# Altium PCB OutputBoard.PcbDoc
Units mil, origin at the board's own origin, x right, y up, seen from the top; angles counter-clockwise.
Board outline 3150 x 2825 mil, 2 copper layers (Top Layer, Bottom Layer); 12 components, 7 nets, 42 pads, 0 vias.
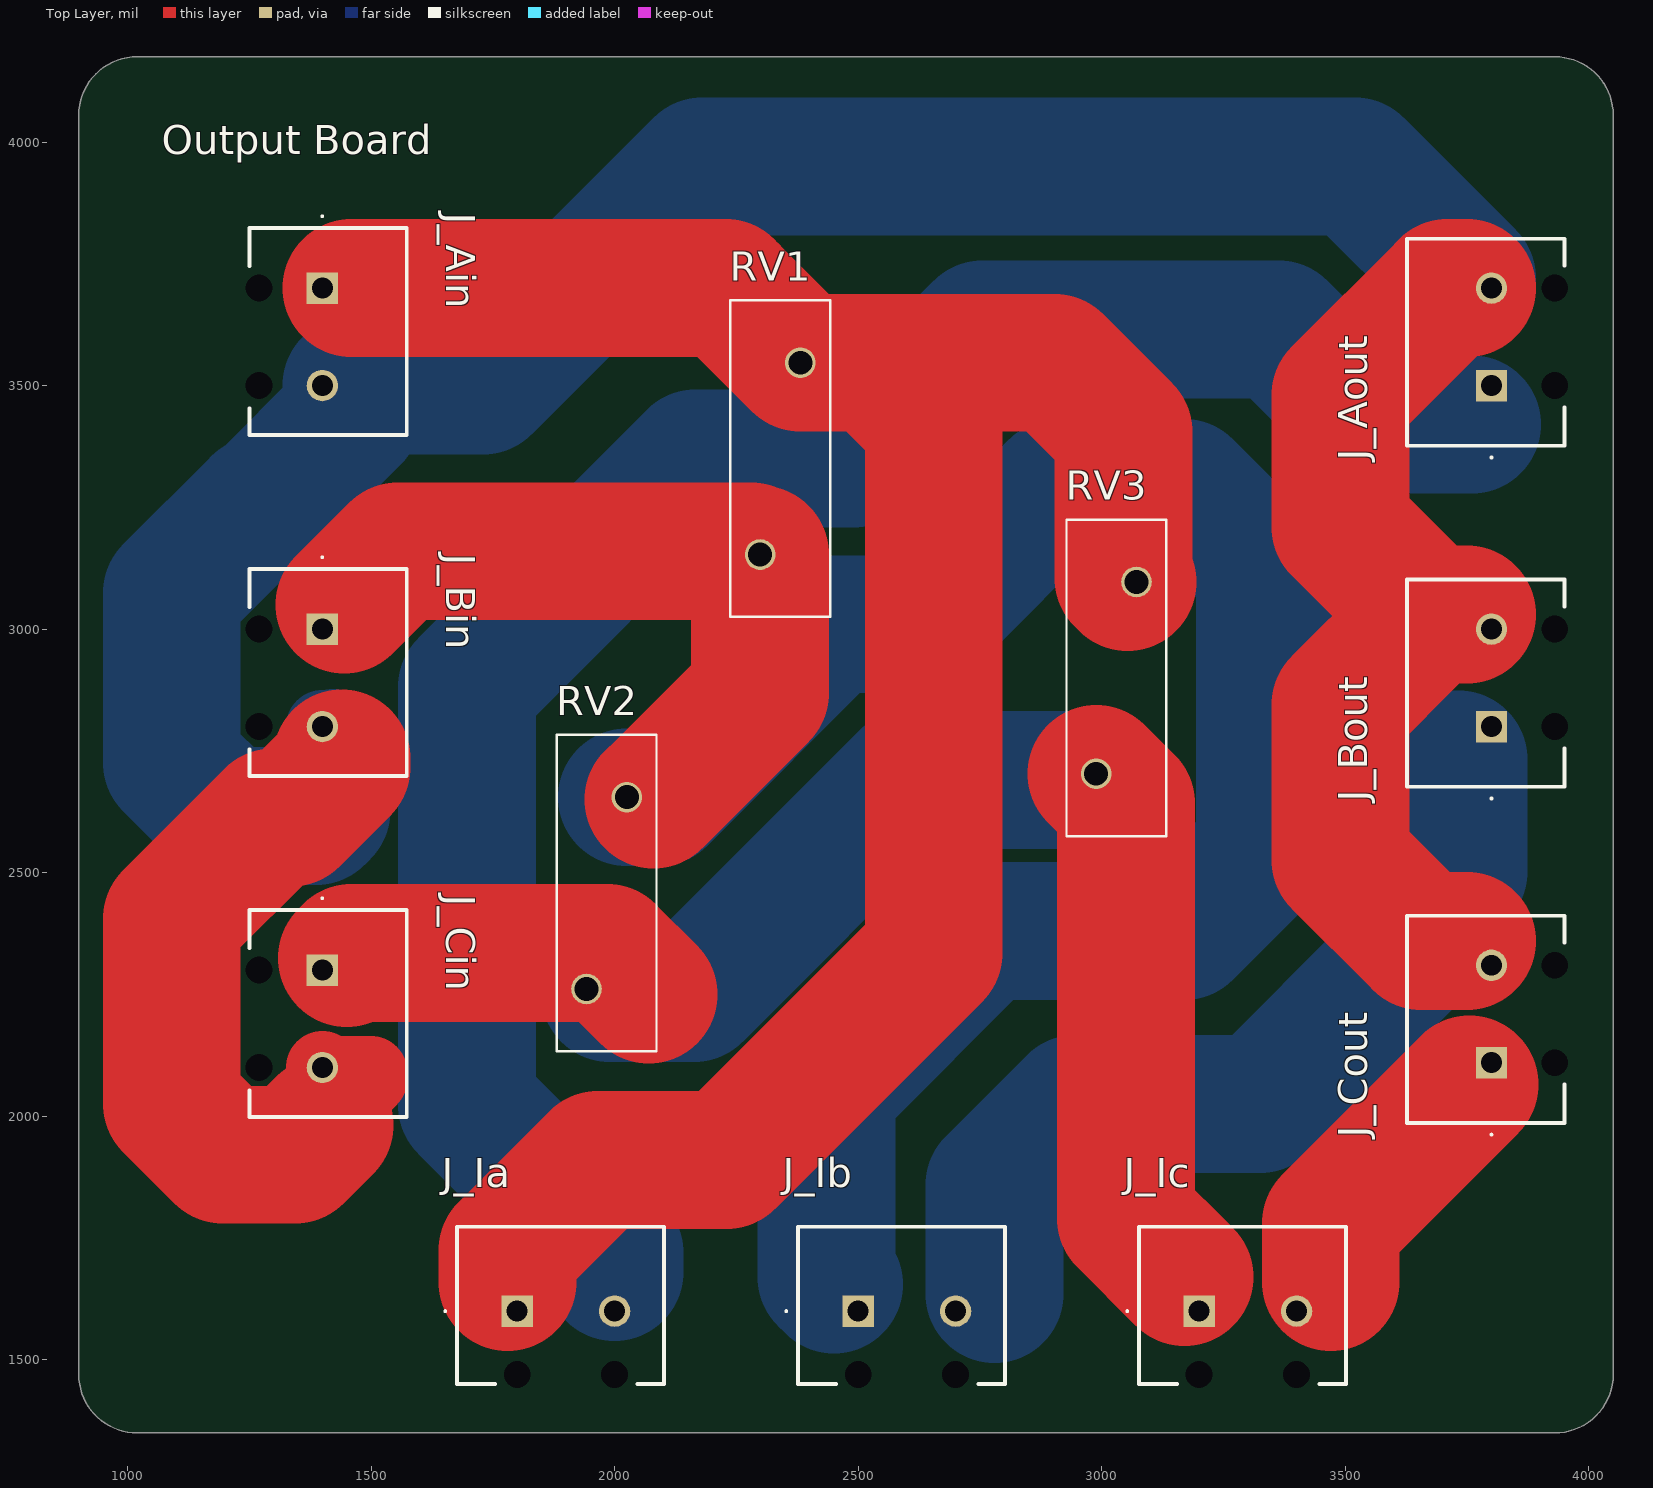
[diagram p0: Top Layer view]
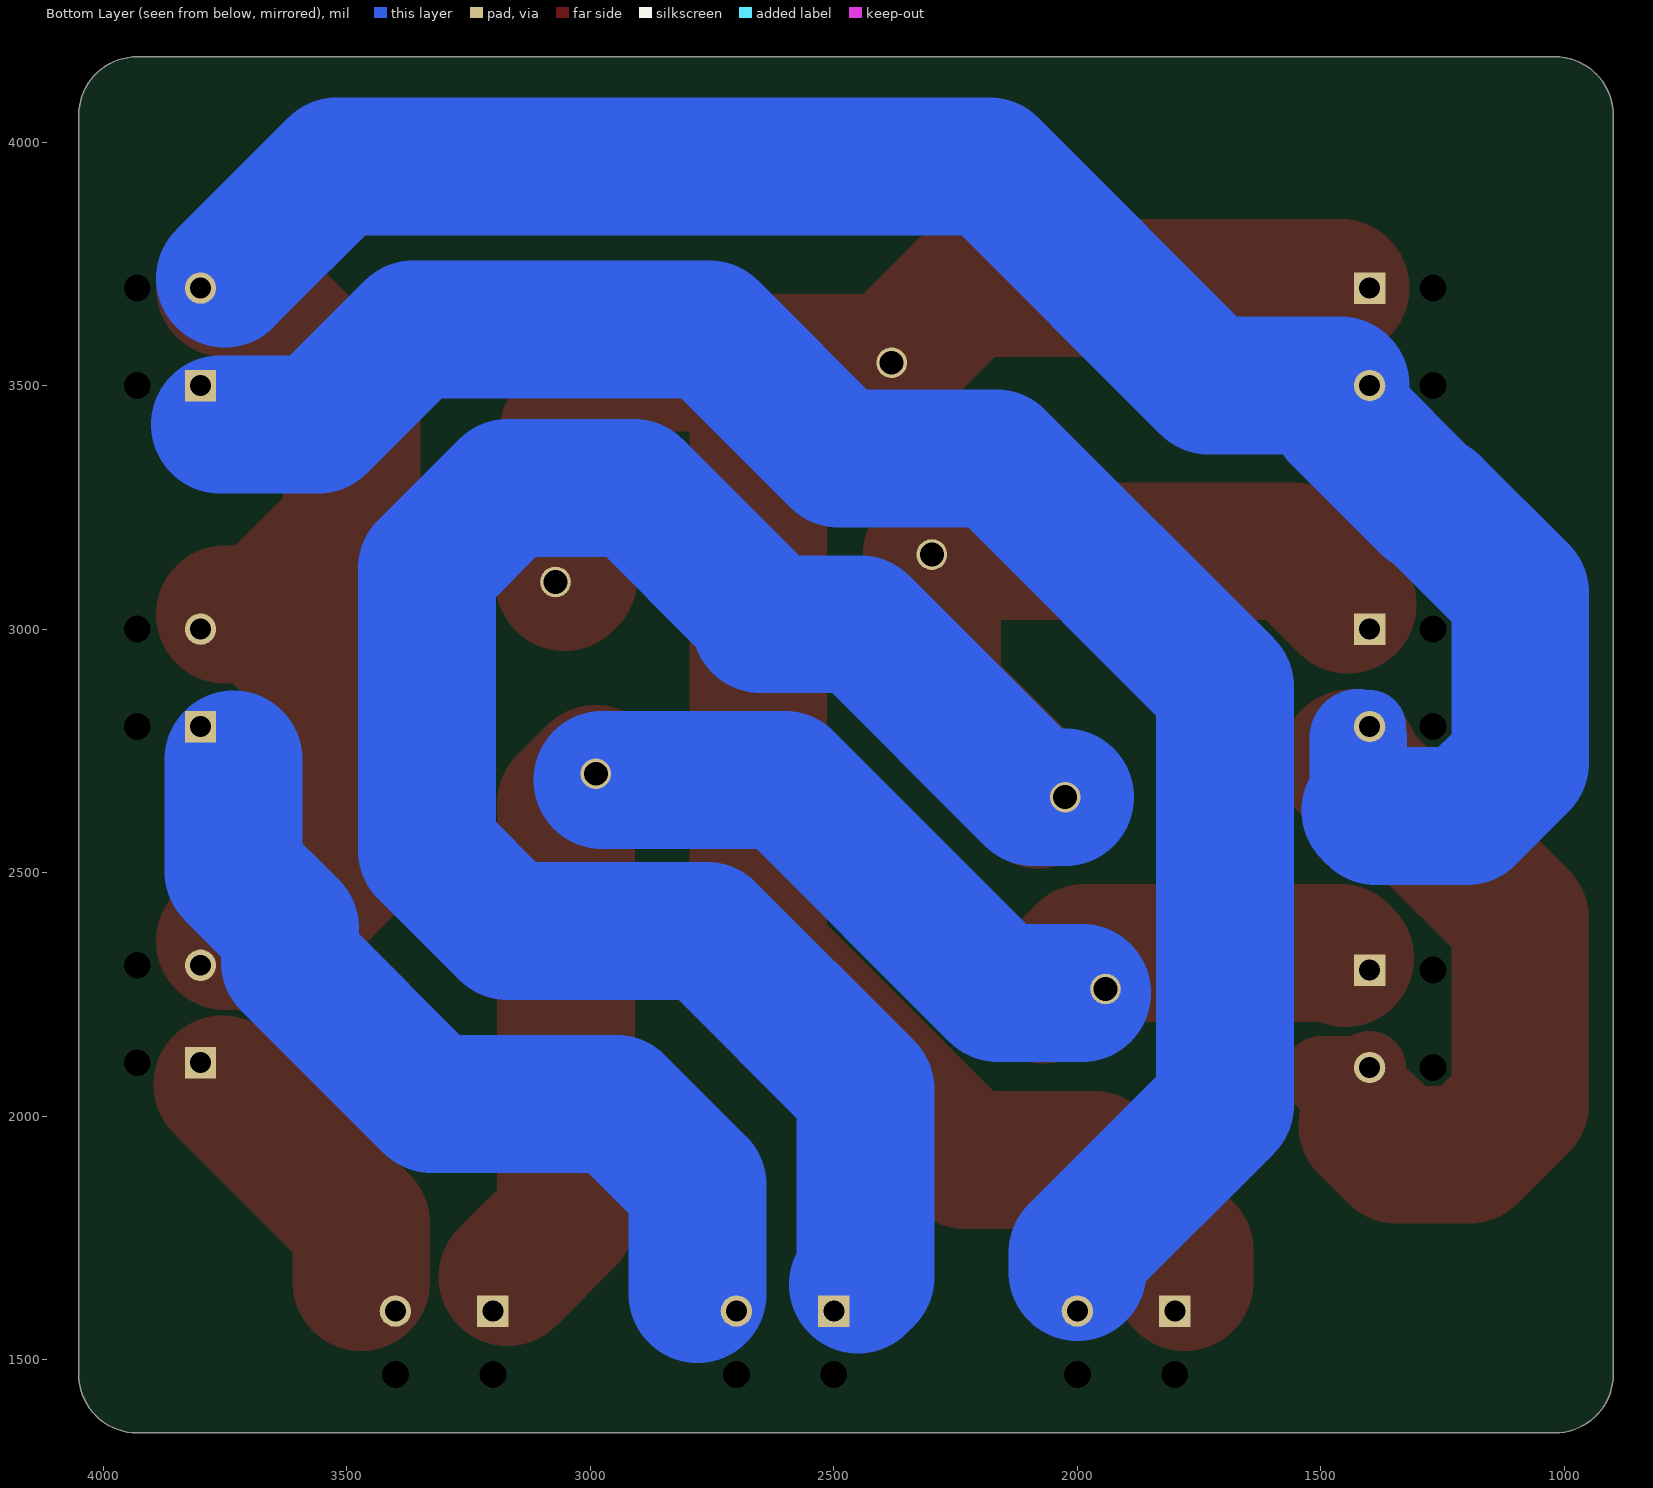
[diagram p1: Bottom Layer view, seen from below]

## Layer stack, top to bottom
Top Solder: solder mask 0.4, Solder Resist, Dk 3.5
Top Layer: signal copper 1.4
Dielectric 1: dielectric 12.6, FR-4, Dk 4.8
Bottom Layer: signal copper 1.4
Bottom Solder: solder mask 0.4, Solder Resist, Dk 3.5

## Board outline
900,1470 900,4055 cw(c1020,4055) 1020,4175 3930,4175 cw(c3930,4055) 4050,4055 4050,1470 cw(c3930,1470) 3930,1350 1025,1350 1020,1350 cw(c1020,1470)

## Design rules (kind name [scope] priority, off if disabled: settings)
Clearance [All] p1: gap=10 ignorepadtopadclearanceinfootprint=FALSE
PolygonConnect [All] p1: connectstyle=Relief reliefconductorwidth=10 reliefentries=4 polygonreliefangle="90 Angle" airgapwidth=10
RoutingVias [All] p1: holewidth=28 width=50 viastyle="Through Hole" minholewidth=28 minwidth=50 maxholewidth=28 maxwidth=50
SolderMaskExpansion [All] p1: expansion=4 istentingtop=FALSE
Width [All] p1: maxlimit=283 minlimit=10 preferedwidth=283
30 further rules are at their usual default settings.

## Components (designator, comment, footprint, x,y, rotation, side; value= is the part's Value field where it differs from the comment)
J_Ain "0398890042" 0398890042 1400,3700 r270 top
J_Aout "0398890042" 0398890042 3800,3500 r90 top
J_Bin "0398890042" 0398890042 1400,3000 r270 top
J_Bout "0398890042" 0398890042 3800,2800 r90 top
J_Cin "0398890042" 0398890042 1400,2300 r270 top
J_Cout "0398890042" 0398890042 3800,2110 r90 top
J_Ia "0398890042" 0398890042 1800,1600 r0 top
J_Ib "0398890042" 0398890042 2500,1600 r0 top
J_Ic "0398890042" 0398890042 3200,1600 r0 top
RV1 "B72214Q0151K101" VAR_B72214Q0151K101 2340,3350 r90 top
RV2 "B72214Q0151K101" VAR_B72214Q0151K101 1983.66,2458.15 r90 top
RV3 "B72214Q0151K101" VAR_B72214Q0151K101 3030,2900 r90 top

## Footprints (in the part's own frame and the unit in brackets; to place one, negate y for a bottom-side part, rotate by r counter-clockwise, add the part's x,y. Pads: shape width x height; smd on the part's side, far side on the other; paste and mask are expansions set on the pad)
0398890042 [mm]
  rect 1.635x1.635 hole 1.09: 1(0,0)
  round 1.635 hole 1.09: 2(5.08,0)
  round 0.7 hole 1.4 unplated: MH1(0,-3.3) MH2(5.08,-3.3)
  silkscreen extent -3.8,-3.8 7.66,4.4
VAR_B72214Q0151K101 [mm]
  round 1.6 hole 1.25: 1(-5,1.05) 2(5,-1.05)
  silkscreen extent -8.25,-2.6 8.25,2.6

## Part data
J_Ain J_Aout J_Bin J_Bout J_Cin J_Cout J_Ia J_Ib J_Ic: "Conn Eurostyle Block 2 POS 5.08mm Solder ST Thru-Hole 17.5A/Contact", Manufacturer_Name=Molex, Datasheet Link=https://tools.molex.com/pdm_docs/sd/398890042_sd.pdf, Geometry.Height=10.25mm, Manufacturer_Part_Number=0398890042
RV1 RV2 RV3: "240 V 8 kA Varistor 1 Circuit Through Hole Radial", Package=None, Check_prices=https://www.snapeda.com/parts/B72214Q0151K101/EPCOS/view-part/?ref=eda, MF=EPCOS, MP=B72214Q0151K101, SnapEDA_Link=https://www.snapeda.com/parts/B72214Q0151K101/EPCOS/view-part/?ref=snap

## Nets (pads, with @x,y where several pads share a name; then routed paths per layer and width w, separated by ;. In a path a pad name is that pad's centre, name@x,y a point inside that pad or via, vN(x,y) a via of type N, cw(c..) or ccw(c..) an arc to the next point about the centre after c; other vN are vias at no path point)
GND: J_Ain.2 J_Aout.2 J_Bin.2 J_Bout.2 J_Cin.2 J_Cout.2 | length 7385.6
  Top Layer w150: J_Cin.2 1410,2090 1500,2090 1500,2076.69 1405,1981.69
  Top Layer w283: 1405,1981.69 1344.25,1920.94 1195.91,1920.94 1091.02,2025.83 1091.02,2405.38 1298.64,2613 1336.31,2613 1440,2716.69 1440,2735 ; 3645.78,3000 3490,2844.22 3490,2525.78 3655.78,2360 3750,2360 ; 3750,3030 3670,3030 3490,3210 3490,3480 3710,3700 3750,3700
  Bottom Layer w150: 1398.5,2627.55 1423.35,2652.39 ; J_Bin.2 1423.35,2776.65
  Bottom Layer w200: 1423.35,2652.39 1423.35,2776.65
  Bottom Layer w283: 1398.5,2627.55 1387.27,2616.31 1200.54,2616.31 1091.02,2725.83 1091.02,3074.17 1272.28,3255.43 1278.74,3255.43 1460,3436.69 1460,3500 1730,3500 2180,3950 3520,3950 3750,3720
NetJ_Ain_1: J_Ain.1 J_Ia.1 RV1.2 RV3.2 | length 4472.8
  Top Layer w283: 1460,3700 2228.19,3700 2237.66,3690.53 RV1.2 2534.22,3546.85 ; 1780,1660 1780,1724.22 1965.78,1910 2230,1910 2655,2335 2655,3426.07 2534.22,3546.85 ; RV3.2@3053.15,3096.85 3045,3105 3045,3405 2903.15,3546.85 2655,3546.85 2534.22,3546.85
NetJ_Aout_1: J_Aout.1 J_Ia.2 | length 3774.4
  Bottom Layer w283: 2000,1680 2000,1720 1697,2023 1697,2881.22 2165.78,3350 2490,3350 2755,3615 3363.36,3615 3558.36,3420 3760,3420
NetJ_Bin_1: J_Bin.1 J_Ib.1 RV1.1 RV2.2 | length 5190.6
  Top Layer w283: 1445,3050 1555,3160 RV1.1@2280,3160 ; 2080,2650 2298.66,2868.66 RV1.1
  Bottom Layer w283: RV2.2 2090,2655 2445,3010 2650,3010 ; 2450,1655 2435,1670 2435,2055 2760,2380 3169.22,2380 3335,2545.78 3335,3124.22 3169.22,3290 2910,3290 2653.56,3033.56
NetJ_Bout_1: J_Bout.1 J_Ib.2 | length 1714.2
  Bottom Layer w283: 2780,1635 2780,1859.22 2945.78,2025 3325,2025 3616.31,2316.31 3616.31,2386.08 3732.5,2502.27 3732.5,2732.5
NetJ_Cin_1: J_Cin.1 J_Ic.1 RV2.1 RV3.1 | length 2934.1
  Top Layer w283: 1450,2325 1460,2335 1985,2335 2070,2250 ; RV3.1 3050,2641.81 3050,1790 3170,1670
  Bottom Layer w283: 1990,2253.15 2163.15,2253.15 2600,2690 RV3.1@2975.51,2690
NetJ_Cout_1: J_Cout.1 J_Ic.2 | length 523.1
  Top Layer w283: 3470,1660 3470,1780 3755,2065
pads on no net: J_Ain.MH1 J_Ain.MH2 J_Aout.MH1 J_Aout.MH2 J_Bin.MH1 J_Bin.MH2 J_Bout.MH1 J_Bout.MH2 J_Cin.MH1 J_Cin.MH2 J_Cout.MH1 J_Cout.MH2 J_Ia.MH1 J_Ia.MH2 J_Ib.MH1 J_Ib.MH2 J_Ic.MH1 J_Ic.MH2

## Silkscreen, mask and mechanical layers (free items; w line width, h text height)
Top Overlay:
  text "Output Board" at 1070,3974.99 h60
Mechanical 1:
  lines w10: 1020,1350 cw(c1020,1470) 900,1470 900,4055 cw(c1020,4055) 1020,4175 3930,4175 cw(c3930,4055) 4050,4055 4050,1470 cw(c3930,1470) 3930,1350 1025,1350